# Altium PCB MPU6050PCB.PcbDoc
Units mm, origin at the board's own origin, x right, y up, seen from the top; angles counter-clockwise.
Board outline 18.29 x 21.59 mm, 2 copper layers (Top Layer, Bottom Layer); 15 components, 12 nets, 62 pads, 11 vias.
Unrouted connection lines stored in the file: 2.
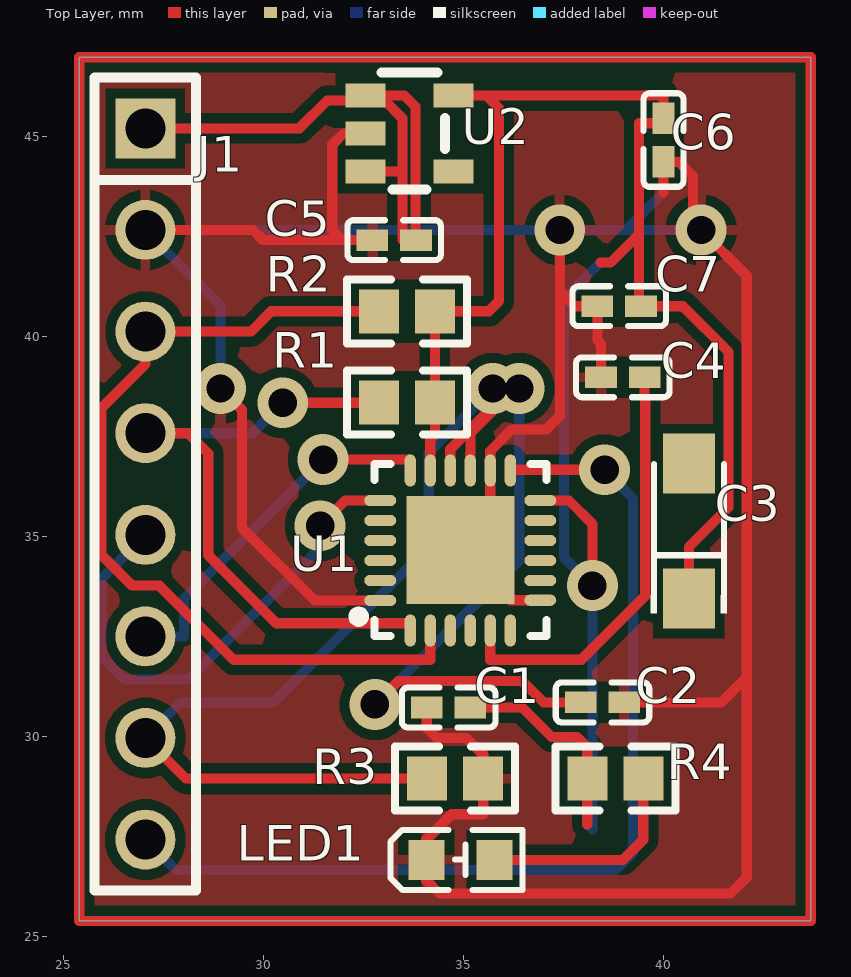
[diagram p0: Top Layer view]
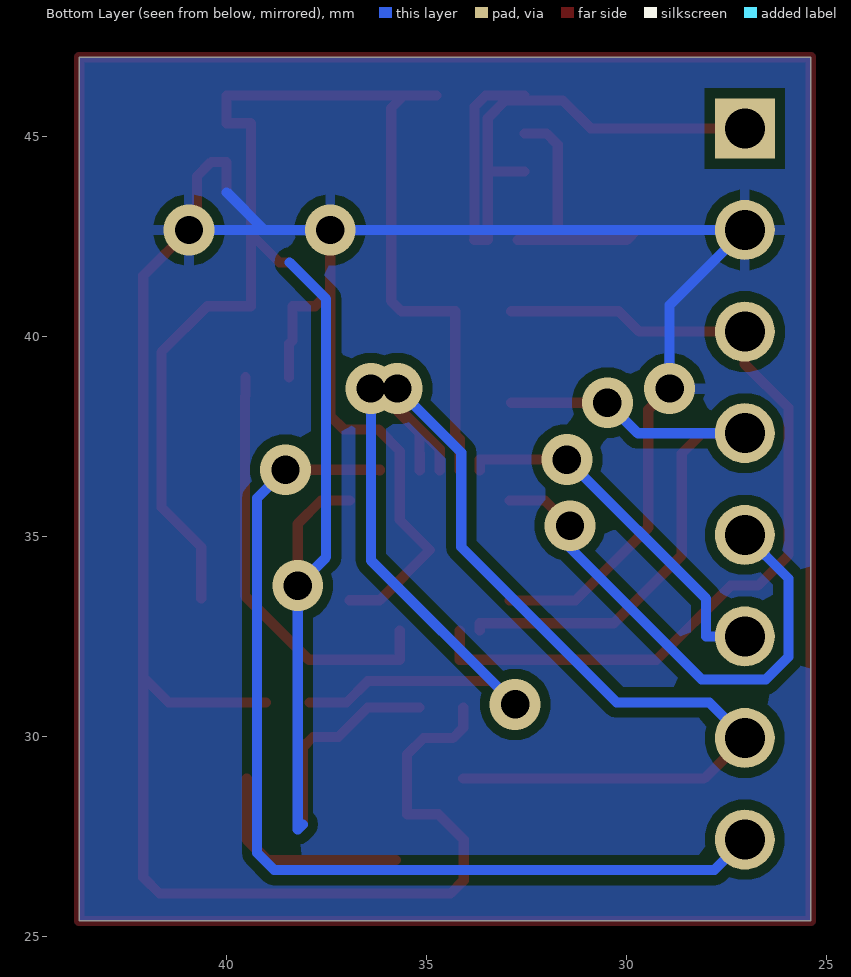
[diagram p1: Bottom Layer view, seen from below]

## Layer stack, top to bottom
Top Solder: solder mask 0.0102, Solder Resist, Dk 3.5
Top Layer: signal copper 0.0356
Dielectric 1: dielectric 0.32, FR-4, Dk 4.8
Bottom Layer: signal copper 0.0356
Bottom Solder: solder mask 0.0102, Solder Resist, Dk 3.5

## Board outline
25.4,25.4 43.688,25.4 43.688,46.99 25.4,46.99

## Design rules (kind name [scope] priority, off if disabled: settings)
Clearance [All] p1: gap=0.254 ignorepadtopadclearanceinfootprint=FALSE except(0.2: Arc-Arc Arc-Track Arc-SMDPad Arc-THPad Track-Track Track-SMDPad Track-THPad SMDPad-SMDPad SMDPad-THPad THPad-THPad)
PolygonConnect [All] p1: connectstyle=Relief reliefconductorwidth=0.254 reliefentries=4 polygonreliefangle="90 Angle" airgapwidth=0.254
RoutingVias [All] p1: holewidth=0.711 width=1.27 viastyle="Through Hole" minholewidth=0.711 minwidth=1.27 maxholewidth=0.711 maxwidth=1.27
SolderMaskExpansion [All] p1: expansion=0.102 istentingtop=FALSE
SupplyNets "Schematic Supply Nets_3" [InNet('+3V3')] p1: voltage=0.000
SupplyNets "Schematic Supply Nets_2" [InNet('+5')] p2: voltage=0.000
SupplyNets "Schematic Supply Nets" [InNet('GND')] p3: voltage=0.000
Width [All] p1: maxlimit=0.254 minlimit=0.254 preferedwidth=0.254
30 further rules are at their usual default settings.

## Components (designator, comment, footprint, x,y, rotation, side; value= is the part's Value field where it differs from the comment)
C1 "10nF" C0402 34.634,30.734 r0 top
C2 ".1uF" C0402 38.481,30.861 r0 top
C3 "0.1uF/4V/104" CAP-SMD_L3.2-W1.6-RD 40.64,35.144 r90 top
C4 "2.2nF/50V" C0402 38.989,38.989 r0 top
C5 "4.7uF" C0402 33.274,42.418 r0 top
C6 "10uF" C0402 40.005,44.921 r90 top
C7 ".1uF" C0402 38.899,40.767 r0 top
J1 "HDR-M-2.54-1*8" HDR-TH_8P-P2.54-V-M 27.051,36.322 r270 top
LED1 "YLED0603R" LED0603-FD 34.925,26.924 r180 top
R1 "4.7K" 0603 33.59,38.354 r0 top
R2 "4.7K" 0603 33.59,40.64 r0 top
R3 "4.7K" 0603 34.798,28.956 r180 top
R4 "2.2k" 0603 38.8,28.956 r0 top
U1 "MPU-6050" QFN-24_L4.0-W4.0-P0.50-BL-EP2.7 34.925,34.659 r90 top
U2 "HX9193-33GB-N" SOT-23-5_L2.9-W1.6-P0.95-LS2.8-BL 33.655,45.085 r270 top

## Footprints (in the part's own frame and the unit in brackets; to place one, negate y for a bottom-side part, rotate by r counter-clockwise, add the part's x,y. Pads: shape width x height; smd on the part's side, far side on the other; paste and mask are expansions set on the pad)
0603 [mm]
  rect 1x1.1 smd paste+0 mask+0.051: 1(-0.7,0) 2(0.7,0)
  silkscreen extent -1.5,-0.8 1.5,0.8
C0402 [mm]
  rect 0.79x0.54 smd paste-100 mask+0.051: 1(-0.545,0) 2(0.545,0)
  silkscreen extent -1.17,-0.5 1.17,0.5
CAP-SMD_L3.2-W1.6-RD [mm]
  rect 1.5x1.296 smd paste+0 mask+0.051: 1(-1.686,0) 2(1.686,0)
  silkscreen extent -2.06,-0.95 1.68,0.95
HDR-TH_8P-P2.54-V-M [mm]
  rect 1.5x1.5 hole 1: 1(-8.89,0)
  round 1.5 hole 1: 2(-6.35,0) 3(-3.81,0) 4(-1.27,0) 5(1.27,0) 6(3.81,0) 7(6.35,0) 8(8.89,0)
  silkscreen extent -10.16,-1.27 10.16,1.27
LED0603-FD [mm]
  rect 0.9x1 smd: 1(-0.85,0) 2(0.85,0)
  silkscreen extent -1.55,-0.75 1.75,0.75
QFN-24_L4.0-W4.0-P0.50-BL-EP2.7 [mm]
  oval 0.28x0.8 smd paste-100 mask+0.05: 1(-1.25,2) 2(-0.75,2) 3(-0.25,2) 4(0.25,2) 5(0.75,2) 6(1.25,2) 13(1.25,-2) 14(0.75,-2) 15(0.25,-2) 16(-0.25,-2) 17(-0.75,-2) 18(-1.242,-2)
  oval 0.8x0.28 smd paste-100 mask+0.05: 7(2,1.25) 8(2,0.75) 9(2,0.25) 10(2,-0.25) 11(2,-0.75) 12(2,-1.25) 19(-2,-1.25) 20(-2,-0.75) 21(-2,-0.25) 22(-2,0.25) 23(-2,0.75) 24(-2,1.25)
  rect 2.7x2.7 smd paste-100 mask+0.05: 25(0.012,0)
  silkscreen extent -2.14,-2.15 2.16,2.79
SOT-23-5_L2.9-W1.6-P0.95-LS2.8-BL [mm]
  rect 0.6x1 smd paste+0 mask+0.05: 1(-0.95,-1.1) 2(0,-1.1) 3(0.95,-1.1) 4(0.95,1.1) 5(-0.95,1.1)
  silkscreen extent -1.52,-0.7 1.4,0.89

## Part data
C1 C2 C4 C5 C6 C7: library part 1UF-C0402
C3: library part 293D155X0010A2TE3
J1: library part 2.54-1*8, JLCPCB Part Class="Extended Part", Manufacturer=ZHOURI(洲日), Add into BOM=yes, Convert to PCB=yes, Datasheet=https://atta.szlcsc.com/upload/public/pdf/source/20250227/F941FC765EF241ABFB2D5D72948A31A5.pdf, Device=2.54-1*8, LCSC Part Name=2.54-1*8, Manufacturer Part=2.54-1*8, Number of Pins=8P, Number of Rows="Single Row", Pin Structure=1x8P, Pitch=2.54mm, Supplier=LCSC, Supplier Footprint=插件,P=2.54mm, Supplier Part=C5156616, Symbol=2.54-1*8
LED1: Color Temperature=-, Emitted Color=Red, Forward Current=25mA, Forward Voltage (VF)=1.8V~2.4V, JLCPCB Part Class="Extended Part", Manufacturer=YONGYUTAI(永裕泰), Operating Temperature=-40℃~+85℃, Add into BOM=yes, Convert to PCB=yes, Datasheet=https://atta.szlcsc.com/upload/public/pdf/source/20231027/FB19AF06E2C70028E58AB5CEDD1BDC72.pdf, Device=YLED0603R, Diode Configuration=-, Dominant Wavelength=620nm~625nm, LCSC Part Name=YLED0603R, Lens Color=-, Luminous Intensity=-, Manufacturer Part=YLED0603R, Mounting Sytle=-, Peak Wavelength=-, Power Dissipation=-, Supplier=LCSC, Supplier Footprint=0603, Supplier Part=C19171390, Symbol=YLED0603R, Viewing Angle=-
R1 R2 R3 R4: library part R_USA
U1: JLCPCB Part Class="Extended Part", Manufacturer="TDK InvenSense(应美盛)", Operating Temperature=-40℃~+85℃, Add into BOM=yes, Convert to PCB=yes, Datasheet=https://atta.szlcsc.com/upload/public/pdf/source/20140425/1457707046159.pdf, Device=MPU-6050, LCSC Part Name=MPU-6050, Manufacturer Part=MPU-6050, Sensor Type=加速度计陀螺仪, Supplier=LCSC, Supplier Footprint=QFN-24-EP(4x4), Supplier Part=C24112, Symbol=MPU-6050_C24112
U2: JLCPCB Part Class="Extended Part", Manufacturer=HX(恒佳兴), Operating Temperature=-, Output Current=300mA, Output Voltage=3.3V, Add into BOM=yes, Convert to PCB=yes, Datasheet=https://atta.szlcsc.com/upload/public/pdf/source/20220412/18D9B33FD58646224E88440BBF52FED7.pdf, Device=HX9193-33GB-N, Features="Low ESR；Overcurrent Protection(OCP)；With ability", LCSC Part Name=HX9193-33GB-N, Manufacturer Part=HX9193-33GB-N, Noise=-, Number of Outputs=-, Output Configuration=-, Output Type=-, Power Supply Rejection Ratio (PSRR)=-, standby current=-, Supplier=LCSC, Supplier Footprint=SOT-23-5, Supplier Part=C2995655, Symbol=HX9193-33GB-N, Voltage - Supply=-, Voltage Dropout=-

## Via types
v1: diameter 1.27, hole 0.711, Top Layer to Bottom Layer, 11 vias

## Nets (pads, with @x,y where several pads share a name; then routed paths per layer and width w, separated by ;. In a path a pad name is that pad's centre, name@x,y a point inside that pad or via, vN(x,y) a via of type N, cw(c..) or ccw(c..) an arc to the next point about the centre after c; other vN are vias at no path point)
+3V3: C1.2 C3.1 C6.2 C7.2 R1.2 R2.2 R4.1 U1.8 U1.13 U2.5 | length 56.1
  Top Layer w0.254: U1.8 34.175,37.44 34.29,37.555 R1.2 R2.2 35.636,40.64 35.89,40.894 35.89,45.72 35.575,46.035 ; U2.5 35.575,46.035 ; C1.2 36.474,30.734 37.211,29.997 37.846,29.997 38.1,29.743 R4.1 38.1,27.813 ; U1.13 37.643,35.908 38.227,35.324 v1(38.227,33.782) ; 38.43,41.859 38.684,41.859 39.395,42.57 ; C3.1 40.64,34.747 41.631,35.738 41.631,39.624 40.488,40.767 C7.2 39.395,40.767 39.395,42.57 ; 35.575,46.035 40.005,46.035 C6.2 40.005,45.339 39.395,45.339 39.395,42.57
  Bottom Layer w0.254: 38.1,27.813 38.227,27.686 v1(38.227,33.782) 37.516,34.493 37.516,40.945 38.43,41.859
+5: C5.2 J1.1 U2.1 U2.3 | length 15.9
  Top Layer w0.254: J1.1 30.902,45.212 31.598,45.908 33.035,45.908 33.477,45.466 33.477,44.135 ; U2.3 33.477,44.135 ; U2.1 33.528,46.035 33.807,45.756 C5.2@33.807,42.418 ; C5.2 C5.2@33.807,42.418 ; 33.477,44.135 33.477,42.418 C5.2@33.807,42.418
ADO: J1.7 R3.2 U1.9 | length 23.6
  Top Layer w0.254: J1.7 28.067,28.956 R3.2 ; U1.9 34.675,37.19 35.738,38.252 v1(35.738,38.71)
  Bottom Layer w0.254: J1.7 27.94,30.861 30.251,30.861 34.138,34.747 34.138,37.109 v1(35.738,38.71)
GND: C1.1 C2.2 C4.1 C5.1 C6.1 C7.1 J1.2 LED1.2 R3.1 U1.1 U1.11 U1.18 U1.25 U2.2 | length 89.8
  Top Layer w0.254: J1.2 29.743,42.672 29.997,42.418 31.979,42.418 ; v1(28.931,38.71) 29.464,38.176 29.464,35.231 31.287,33.409 U1.1 ; U2.2 32.004,45.085 31.725,44.806 31.725,42.672 31.979,42.418 ; C5.1 31.979,42.418 ; C1.1 34.087,30.734 34.087,30.226 34.341,29.972 35.077,29.972 35.498,29.552 R3.1 35.498,28.067 34.71,28.067 34.075,27.432 LED1.2 34.075,26.416 34.405,26.086 41.681,26.086 42.088,26.492 42.088,31.496 ; U1.18 36.18,33.416 U1.25 35.675,35.421 U1.11 35.675,37.148 36.214,37.687 37.078,37.687 37.414,38.024 37.414,41.148 ; v1(37.414,42.672) 37.414,41.148 ; C4.1 38.444,39.827 38.354,39.917 C7.1 37.795,40.767 37.414,41.148 ; C2.2 41.453,30.861 42.088,31.496 ; 40.005,43.612 C6.1 40.386,44.376 40.742,44.02 40.742,42.875 v1(40.945,42.672) 42.088,41.529 42.088,31.496
  Bottom Layer w0.254: v1(28.931,38.71) 28.931,40.792 J1.2 v1(37.414,42.672) 39.065,42.672 ; 40.005,43.612 39.065,42.672 ; v1(40.945,42.672) 39.065,42.672
NetC2_1: C2.1 U1.10 | length 17.6
  Top Layer w0.254: v1(32.791,30.81) 33.376,31.394 36.474,31.394 37.008,30.861 C2.1 ; U1.10 35.175,37.084 35.179,37.088 35.179,37.594 36.295,38.71 v1(36.398,38.71)
  Bottom Layer w0.254: v1(32.791,30.81) 36.398,34.417 v1(36.398,38.71)
NetC4_2: C4.2 U1.20 | length 10.7
  Top Layer w0.254: U1.20 35.675,31.928 37.948,31.928 39.548,33.528 39.548,38.506 39.534,38.52 C4.2
NetJ1_8: J1.8 U1.12 | length 24.9
  Top Layer w0.254: U1.12 36.175,36.678 v1(38.532,36.678)
  Bottom Layer w0.254: J1.8 27.813,26.67 38.814,26.67 39.243,27.099 39.243,35.966 v1(38.532,36.678)
NetLED1_1: LED1.1 R4.2 | length 5.5
  Top Layer w0.254: LED1.1 38.992,26.924 39.5,27.432 R4.2
SCL: J1.3 R2.1 U1.23 | length 22.1
  Top Layer w0.254: R2.1 30.201,40.64 29.693,40.132 J1.3 27.051,39.319 25.959,38.227 25.959,34.544 26.721,33.782 27.401,33.782 29.255,31.928 34.175,31.928 U1.23
SDA: J1.4 R1.1 U1.24 | length 16.4
  Top Layer w0.254: J1.4 28.118,37.592 28.626,37.084 28.626,34.544 30.328,32.842 33.675,32.842 U1.24 ; v1(30.485,38.354) R1.1
  Bottom Layer w0.254: J1.4 29.723,37.592 v1(30.485,38.354)
XCL: J1.6 U1.7 | length 9.3
  Top Layer w0.254: v1(31.496,36.932) 33.675,36.932 U1.7
  Bottom Layer w0.254: J1.6 28.016,32.512 28.016,33.452 v1(31.496,36.932)
XDA: J1.5 U1.6 | length 12.9
  Top Layer w0.254: v1(31.42,35.281) 32.048,35.908 U1.6
  Bottom Layer w0.254: J1.5 25.959,33.96 25.959,32.004 26.528,31.435 28.128,31.435 31.42,34.727 v1(31.42,35.281)
pads on no net: C3.2 U1.2 U1.3 U1.4 U1.5 U1.14 U1.15 U1.16 U1.17 U1.19 U1.21 U1.22 U2.4
copper on no net: | length 79.8
  Top Layer w0.254: 25.4,25.4 25.4,46.99 43.688,46.99 43.688,25.4 25.4,25.4

## Polygon pours and split planes (outlines as drawn)
GND on Top Layer "GND_L01_P000" (solid, pour order 0): 25.4,25.4 43.688,25.4 43.688,46.99 25.4,46.99
GND on Bottom Layer "GND_L02_P001" (solid, pour order 1): 25.4,25.4 43.688,25.4 43.688,46.99 25.4,46.99